# Altium PCB SedraGen.PcbDoc
Units mm, origin at the board's own origin, x right, y up, seen from the top; angles counter-clockwise.
Board outline 50 x 50 mm, 2 copper layers (Top Layer, Bottom Layer); 31 components, 17 nets, 69 pads, 7 vias.
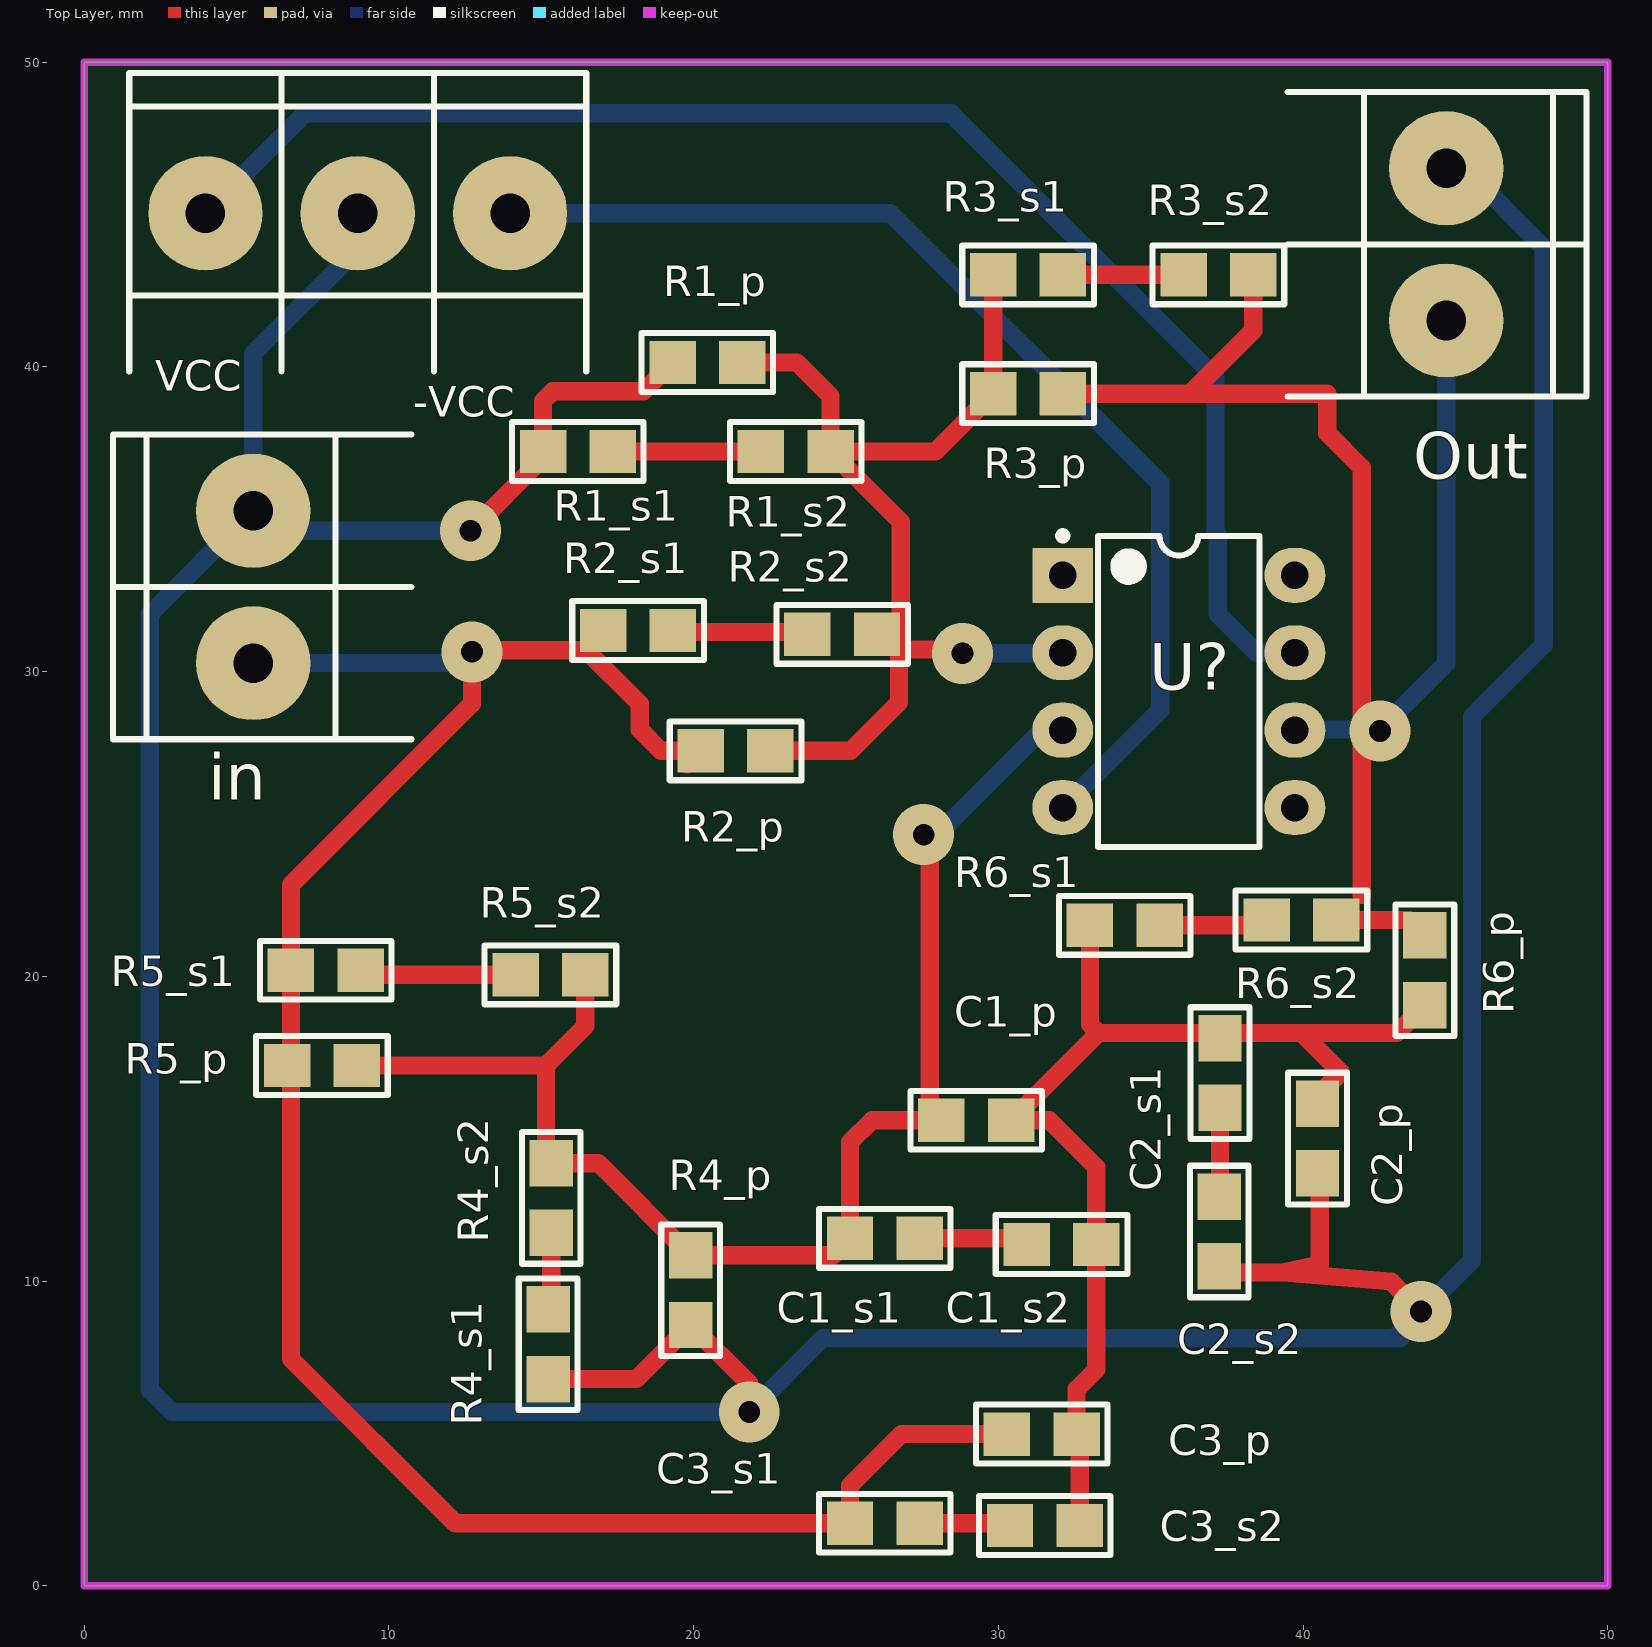
[diagram p0: Top Layer view]
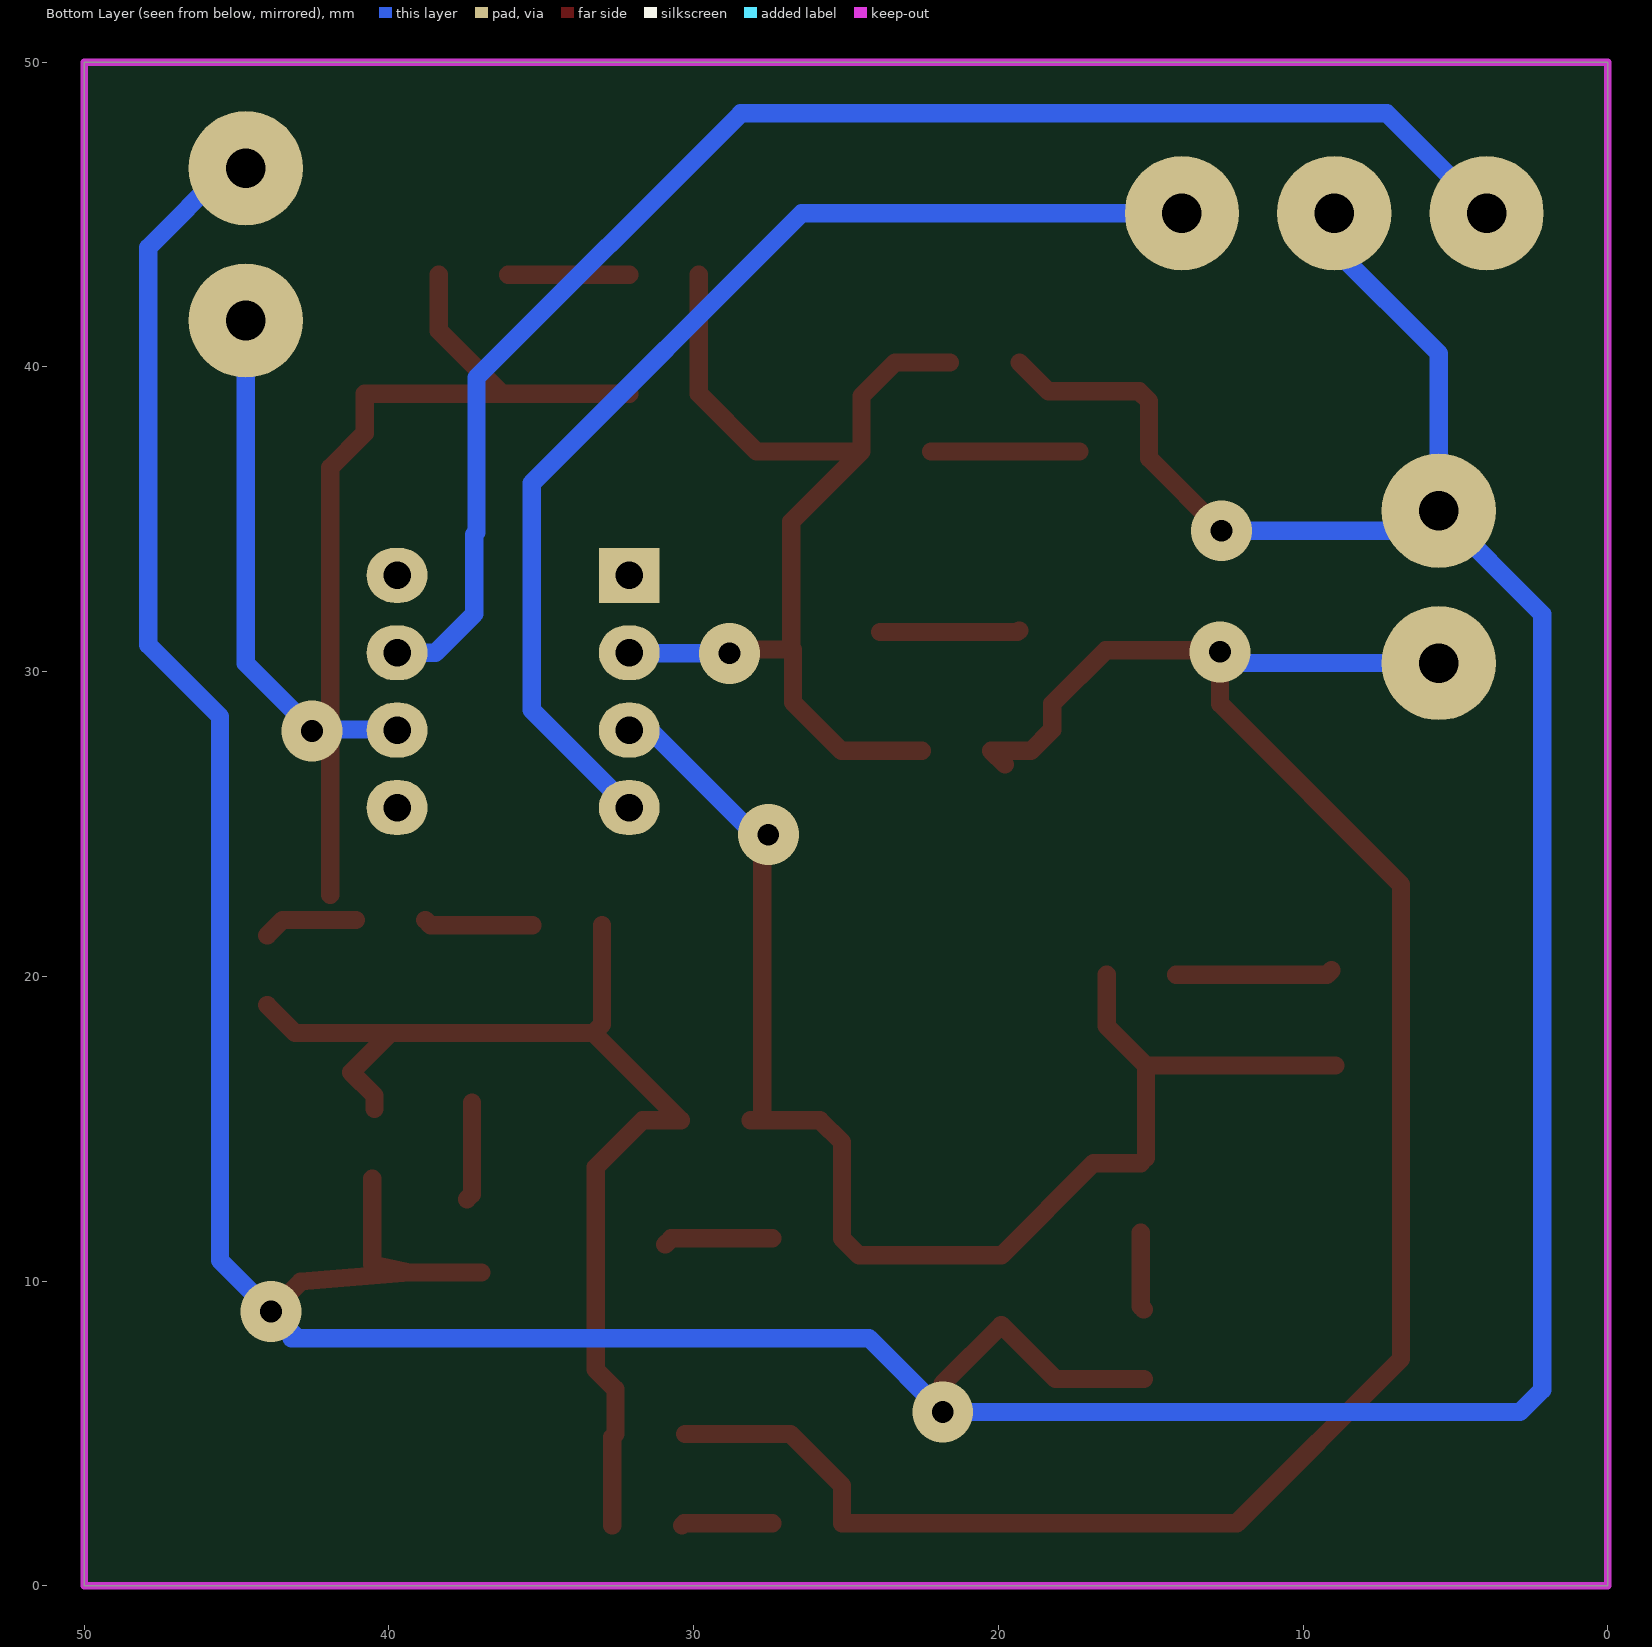
[diagram p1: Bottom Layer view, seen from below]
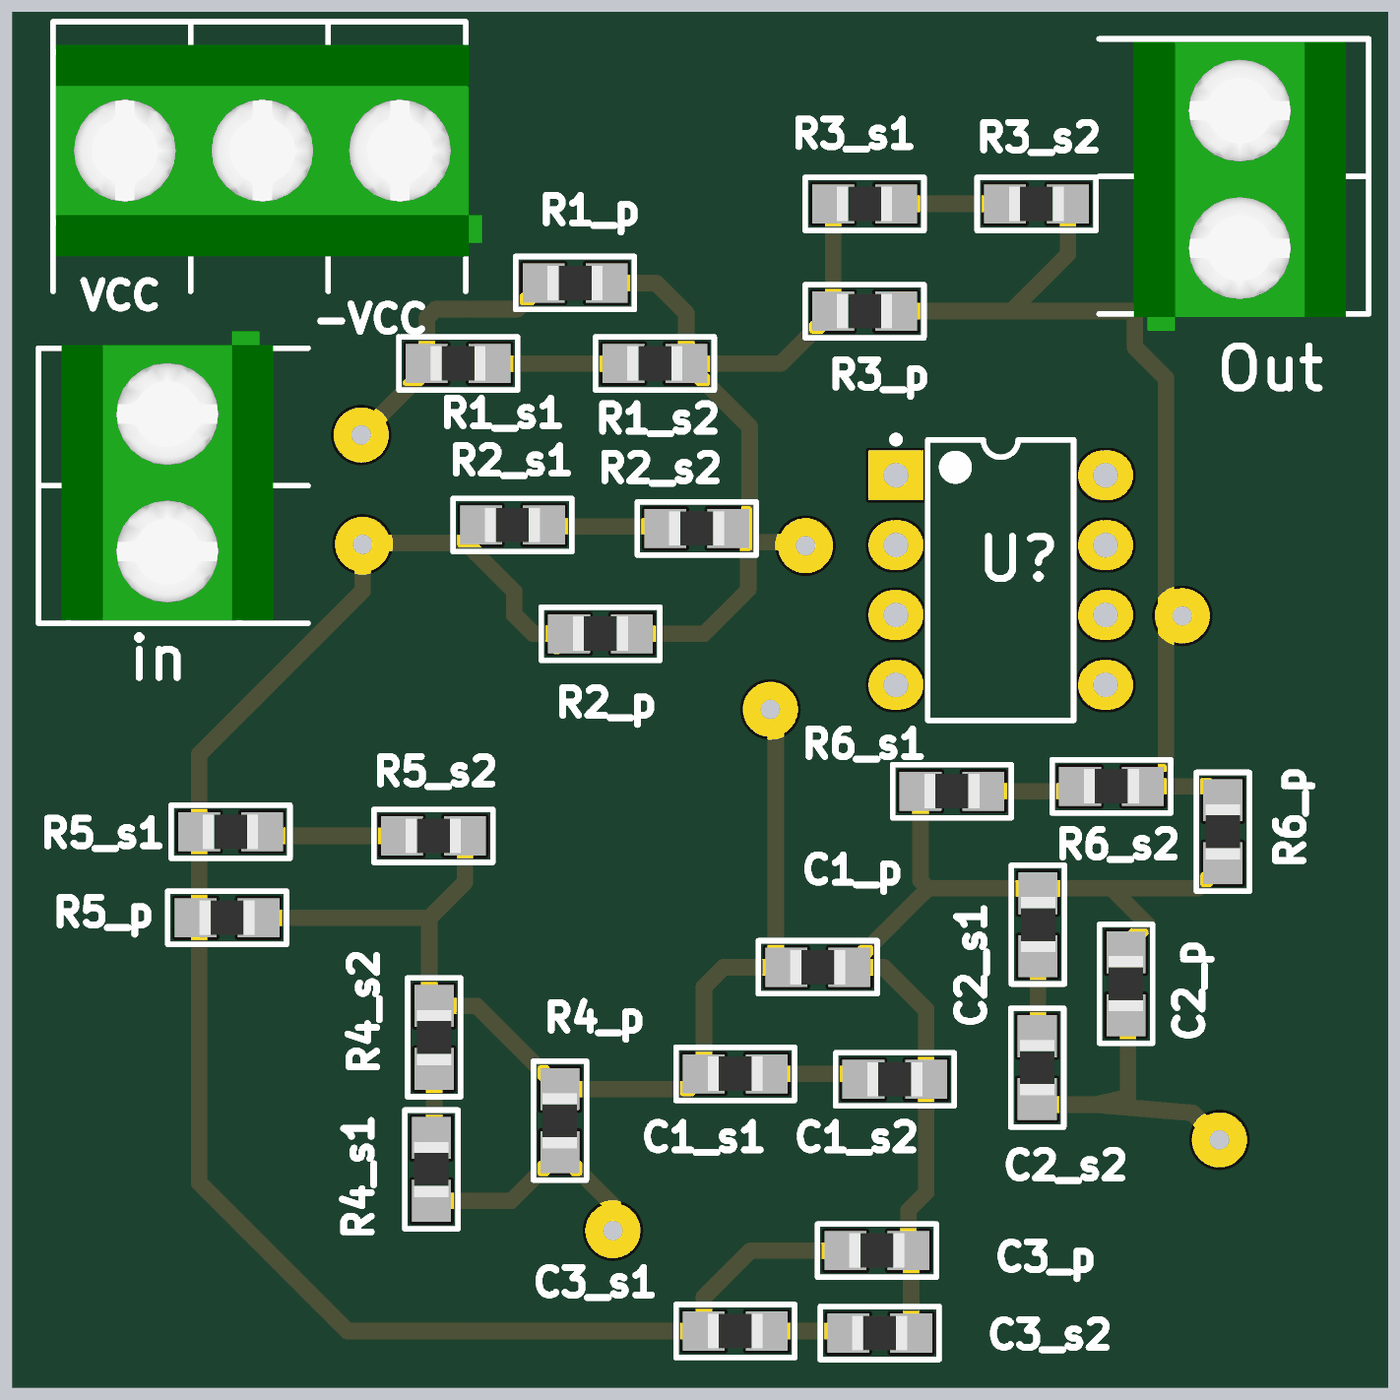
[diagram p2: 3D render of the assembled board from above, using the file's embedded part models]

## Layer stack, top to bottom
Top Solder: solder mask 0.0102, Solder Resist, Dk 3.5
Top Layer: signal copper 0.0356
Dielectric 1: dielectric 0.32, FR-4, Dk 4.8
Bottom Layer: signal copper 0.0356
Bottom Solder: solder mask 0.0102, Solder Resist, Dk 3.5

## Board outline
0,0 0,50 50,50 50,0

## Design rules (kind name [scope] priority, off if disabled: settings)
Clearance [All] p1: gap=0.254
PolygonConnect [All] p1: connectstyle=Relief reliefconductorwidth=0.254 reliefentries=4 polygonreliefangle="90 Angle" airgapwidth=0.254
RoutingVias [All] p1: holewidth=0.711 width=1.27 viastyle="Through Hole" minholewidth=0.711 minwidth=1.27 maxholewidth=0.711 maxwidth=1.27
SolderMaskExpansion [All] p1: expansion=0.102
Width [All] p1: maxlimit=0.6 minlimit=0.6 preferedwidth=0.6
30 further rules are at their usual default settings.

## Components (designator, comment, footprint, x,y, rotation, side; value= is the part's Value field where it differs from the comment)
C1_p "CAP" 0805 29.275,15.275 r0 top
C1_s1 "CAP" 0805 26.275,11.4 r0 top
C1_s2 "CAP" 0805 32.075,11.2 r0 top
C2_p "CAP" 0805 40.475,14.675 r270 top
C2_s1 "CAP" 0805 37.275,16.825 r270 top
C2_s2 "CAP" 0805 37.25,11.625 r270 top
C3_p "CAP" 0805 31.425,4.975 r0 top
C3_s1 "CAP" 0805 26.275,2.05 r0 top
C3_s2 "CAP" 0805 31.525,1.975 r0 top
in "BORNERA 2" BORNERA2 5.542,32.781 r0 top (schematic designator In)
Out "BORNERA 2" BORNERA2 44.7,44.025 r180 top
R1_p "RES" 0805 20.45,40.15 r0 top
R1_s1 "RES" 0805 16.2,37.225 r0 top
R1_s2 "RES" 0805 23.35,37.225 r0 top
R2_p "RES" 0805 21.375,27.4 r0 top
R2_s1 "RES" 0805 18.175,31.35 r0 top
R2_s2 "RES" 0805 24.875,31.225 r0 top
R3_p "RES" 0805 30.975,39.125 r0 top
R3_s1 "RES" 0805 30.975,43.025 r0 top
R3_s2 "RES" 0805 37.225,43.025 r0 top
R4_p "RES" 0805 19.9,9.7 r90 top
R4_s1 "RES" 0805 15.225,7.925 r90 top
R4_s2 "RES" 0805 15.325,12.725 r90 top
R5_p "RES" 0805 7.8,17.075 r0 top
R5_s1 "RES" 0805 7.925,20.2 r0 top
R5_s2 "RES" 0805 15.3,20.05 r0 top
R6_p "RES" 0805 44,20.2 r90 top
R6_s1 "RES" 0805 34.15,21.675 r0 top
R6_s2 "RES" 0805 39.95,21.85 r0 top
U? "TL081ACP" TI-P8 35.925,29.35 r0 top
VCC "BORNERA 3" BORNERA3 8.975,45.05 r270 top (schematic designator Alimentacion)

## Footprints (in the part's own frame and the unit in brackets; to place one, negate y for a bottom-side part, rotate by r counter-clockwise, add the part's x,y. Pads: shape width x height; smd on the part's side, far side on the other; paste and mask are expansions set on the pad)
0805 [mil] "Pasivo 0805"
  rect 60x56 smd: 1(-45,0) 2(45,0)
  silkscreen extent -85,-38 85,38, body extent -40,-24 39,25, height 15
BORNERA2 [mm] "Bornera con Tornillos 5mm separación"
  round 3.75 hole 1.3: 1(0,2.5) 2(0,-2.5)
  silkscreen extent -4.6,-5 5.2,5, body extent -3.76,-4.89 3.94,5.61, height 10
BORNERA3 [mm] "Bornera con Tornillos 5mm separación"
  round 3.75 hole 1.3: 1(0,5) 2(0,0) 3(0,-5)
  silkscreen extent -4.6,-7.5 5.2,7.5, body extent -3.76,-7.39 3.94,8.11, height 10.05
TI-P8 [mm] "DIP, 8-Leads, Body 9.59x6.35mm, Pitch 2.54mm"
  rect 2x1.8 hole 0.9: 1(-3.81,3.81)
  oval 2x1.8 hole 0.9: 2(-3.81,1.27) 3(-3.81,-1.27) 4(-3.81,-3.81) 5(3.81,-3.81) 6(3.81,-1.27) 7(3.81,1.27) 8(3.81,3.81)
  silkscreen extent -3.93,-5.1 2.65,5.23, body extent -3.95,-5.07 3.95,5.07, height 5.08

## Part data
U?: "JFET-Input Operational Amplifier, 7 to 36 V, 0 to 70 degC, 8-pin DIP (P8), Pb-Free (RoHS)"

## Via types
v1: diameter 2, hole 0.711, Top Layer to Bottom Layer, 7 vias

## Nets (pads, with @x,y where several pads share a name; then routed paths per layer and width w, separated by ;. In a path a pad name is that pad's centre, name@x,y a point inside that pad or via, vN(x,y) a via of type N, cw(c..) or ccw(c..) an arc to the next point about the centre after c; other vN are vias at no path point)
-VCC: U?.4 VCC.1 | length 37
  Bottom Layer w0.6: VCC.1 26.45,45.05 35.315,36.185 35.315,28.74 U?.4
GND: C2_p.2 C2_s2.2 in.1 Out.2 R1_p.1 R1_s1.1 R4_p.1 R4_s1.1 VCC.2 | length 163.7
  Top Layer w0.6: v1(12.675,34.625) 15.057,37.007 R1_s1.1 15.057,38.882 15.375,39.2 18.357,39.2 R1_p.1 ; R4_s1.1 18.125,6.782 R4_p.1 21.825,6.632 v1(21.825,5.7) ; C2_s2.2@36.975,10.282 39.332,10.282 ; C2_p.2@40.55,13.357 40.55,10.548 39.332,10.282 ; v1(43.875,9) 42.893,9.982 39.332,10.282
  Bottom Layer w0.6: VCC.2 8.975,43.875 5.542,40.442 in.1 ; v1(12.675,34.625) 6.198,34.625 in.1 ; 43.075,8.2 v1(43.875,9) 45.55,10.675 45.55,28.525 47.9,30.875 47.9,43.925 45.3,46.525 Out.2 ; 43.2,8.125 24.25,8.125 v1(21.825,5.7) 2.875,5.7 2.15,6.425 2.15,31.889 in.1
NetC1_p_1: C1_p.1 C1_s1.1 R4_p.2 R4_s2.2 R5_p.2 R5_s2.2 U?.3 | length 46.7
  Top Layer w0.6: R5_p.2 15.15,17.075 ; R4_s2.2@15.15,14.043 15.15,17.075 ; R4_s2.2 16.875,13.868 R4_p.2 24.575,10.843 C1_s1.1 25.132,14.557 25.85,15.275 C1_p.1 ; R5_s2.2 16.443,18.368 15.15,17.075 ; v1(27.55,24.65) 28,24.65 27.75,24.9 C1_p.1@27.75,15.65
  Bottom Layer w0.6: v1(27.55,24.65) 28,24.65 31.43,28.08 U?.3@32.3,28.08
NetC1_p_2: C1_p.2 C1_s2.2 C2_p.1 C2_s1.1 C3_p.2 C3_s2.2 R6_p.1 R6_s1.1 | length 37.5
  Top Layer w0.6: C3_p.2 32.568,6.443 33.218,7.093 C1_s2.2 33.218,13.732 31.675,15.275 C1_p.2 33.286,18.143 ; C3_s2.2 C3_p.2@32.668,4.875 ; R6_s1.1 33.007,18.422 33.286,18.143 ; C2_p.1@40.475,15.643 40.475,16.086 41.239,16.85 41.243,16.85 39.95,18.143 ; R6_p.1 43.086,18.143 39.95,18.143 ; 33.286,18.143 39.95,18.143
NetC1_s1_2: C1_s1.2 C1_s2.1 | length 3.6
  Top Layer w0.6: C1_s1.2 30.732,11.4 C1_s2.1
NetC2_s1_2: C2_s1.2 C2_s2.1 | length 3.2
  Top Layer w0.6: C2_s1.2@37.275,15.857 37.275,12.85 C2_s2.1@37.437,12.688
NetC3_p_1: C3_p.1 C3_s1.1 in.2 R2_p.1 R2_s1.1 R5_p.1 R5_s1.1 | length 70.7
  Top Layer w0.6: R2_p.1@19.782,26.95 R2_p.1 18.925,27.4 18.232,28.093 18.232,28.943 16.475,30.7 12.775,30.7 v1(12.725,30.65) 12.725,28.95 6.782,23.007 R5_s1.1 6.782,7.443 12.175,2.05 C3_s1.1 25.132,3.282 26.825,4.975 C3_p.1
  Bottom Layer w0.6: in.2 12.356,30.281 v1(12.725,30.65)
NetC3_s1_2: C3_s1.2 C3_s2.1 | length 3
  Top Layer w0.6: C3_s1.2 30.307,2.05 C3_s2.1
NetOut_1: Out.1 R3_p.2 R3_s2.2 R6_p.2 R6_s2.2 U?.6 | length 50.6
  Top Layer w0.6: R3_p.2 36.3,39.125 ; R3_s2.2 38.368,41.193 36.3,39.125 ; R6_s2.2 43.493,21.85 R6_p.2 ; 41.925,22.682 41.925,28.1 41.925,36.7 40.8,37.825 40.8,39.125 36.3,39.125
  Bottom Layer w0.6: U?.6 39.755,28.1 41.925,28.1 42.525,28.1 44.7,30.275 Out.1
  other v1: 42.525,28.05
NetR1_p_2: R1_p.2 R1_s2.2 R2_p.2 R2_s2.2 R3_p.1 R3_s1.1 U?.2 | length 34.7
  Top Layer w0.6: R1_p.2 23.393,40.15 24.493,39.05 R1_s2.2 ; R2_p.2 25.15,27.4 26.743,28.993 R2_s2.2@26.743,30.725 ; v1@28.825,30.725 R2_s2.2@26.743,30.725 ; R3_s1.1 R3_p.1 27.932,37.225 R1_s2.2 ; R1_s2.2 26.8,34.918 26.8,30.782 R2_s2.2@26.743,30.725
  Bottom Layer w0.6: v1(28.825,30.6) U?.2@32.115,30.6
NetR1_s1_2: R1_s1.2 R1_s2.1 | length 4.9
  Top Layer w0.6: R1_s1.2 R1_s2.1
NetR2_s1_2: R2_s1.2 R2_s2.1 | length 4.6
  Top Layer w0.6: R2_s1.2 19.368,31.3 R2_s2.1@23.882,31.3
NetR3_s1_2: R3_s1.2 R3_s2.1 | length 4
  Top Layer w0.6: R3_s1.2 R3_s2.1
NetR4_s1_2: R4_s1.2 R4_s2.1 | length 2.6
  Top Layer w0.6: R4_s1.2 15.325,9.168 R4_s2.1
NetR5_s1_2: R5_s1.2 R5_s2.1 | length 5.2
  Top Layer w0.6: R5_s1.2 9.218,20.05 R5_s2.1
NetR6_s1_2: R6_s1.2 R6_s2.1 | length 3.6
  Top Layer w0.6: R6_s1.2 38.632,21.675 R6_s2.1
VCC: U?.7 VCC.3 | length 48.9
  Bottom Layer w0.6: VCC.3 7.25,48.325 28.45,48.325 37.125,39.65 37.125,34.575 37.2,34.5 37.2,31.9 38.48,30.62 U?.7
pads on no net: U?.1 U?.5 U?.8

## Keep-outs
Keep-Out Layer:
  the board outline again, w0.254

## Silkscreen, mask and mechanical layers (free items; w line width, h text height)
Top Overlay:
  text "-VCC" at 10.8,38.375 h1